# EAGLE board test (EAGLE 9.4.2)
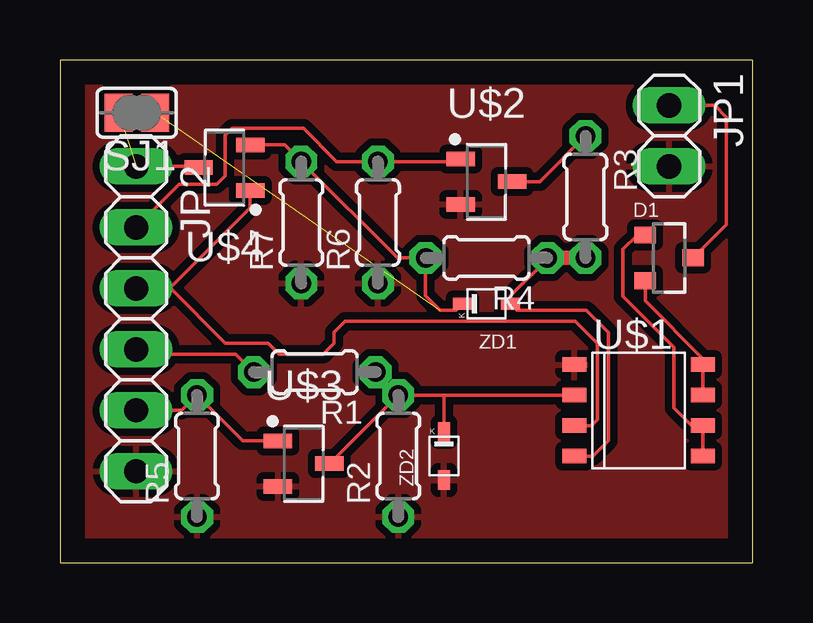
[diagram p0: board, top side]

Size 28.88 x 20.95 mm. Coordinates in mm from the lower left corner, seen from the top.
Outline: 0,0 28.88,0 28.88,20.95 0,20.95 0,0
Copper layers (1*16): Top 0.035mm / dielectric 1.5mm / Bottom 0.035mm
Design rules "default *": minimum track width 6mil, minimum drill 0.35mm, track to track 12mil, track to pad 12mil, pad to pad 12mil, via to via 12mil, smd to smd 12mil, copper to edge 40mil, drill to drill 6mil, minimum pad ring 10mil, minimum via ring 8mil, stop-mask expansion 4mil, vias tented up to drill 0mil, thermal gap 12mil

## Footprints (pad centres in the part's own frame; a part is rotated, then mirrored left to right if it is on the bottom)
SOT23 = smd 0.7 x 0.9: 1 -0.95,-1; 2 0.95,-1; 3 0,1
1X02 = drill 1.016 long: 1 -1.27,0; 2 1.27,0
1X06 = drill 1.016 long: 1 -6.35,0; 2 -3.81,0; 3 -1.27,0; 4 1.27,0; 5 3.81,0; 6 6.35,0
0204/5 = drill 0.813 octagon: 1 -2.54,0; 2 2.54,0
SJ = smd 1.168 x 1.6: 1 -0.762,0; 2 0.762,0
SOIC-08LG = smd 0.6 x 1: 1 -1.905,-2.675; 2 -0.635,-2.675; 3 0.635,-2.675; 4 1.905,-2.675; 5 1.905,2.675; 6 0.635,2.675; 7 -0.635,2.675; 8 -1.905,2.675
SOT95P250X120-3 = smd 1.18 x 0.609: 1 -1.075,0.95; 2 -1.075,-0.95; 3 1.075,0
SOD523 = smd 0.5 x 0.8: P$1 0,1; P$2 0,-1

## Placement (x,y rotation side)
D1  GSD2004S  [SOT23]  25.4,12.7 270 top
JP1  [1X02]  25.4,17.78 270 top
JP2  [1X06]  3.17,10.16 270 top
R1  103  [0204/5]  10.62,7.94 180 top
R2  103  [0204/5]  14.11,4.45 90 top
R3  104  [0204/5]  21.91,15.24 270 top
R4  103  [0204/5]  17.78,12.7 180 top
R5  103  [0204/5]  5.71,4.45 90 top
R6  103  [0204/5]  13.26,14.17 90 top
R7  105  [0204/5]  10.06,14.17 90 top
SJ1  [SJ]  3.2,18.75 180 top
U$1  TC1550TG  [SOIC-08LG]  24.13,6.35 270 top
U$2  2SK3072-TB-E  [SOT95P250X120-3]  17.78,15.88 0 top
U$3  IRLML6344TRPBFTR  [SOT95P250X120-3]  10.16,4.13 0 top
U$4  2SK3072-TB-E  [SOT95P250X120-3]  6.86,16.46 180 top
ZD1  MM5Z15V  [SOD523]  17.78,10.79 90 top
ZD2  MM5Z15V  [SOD523]  16.01,4.45 0 top

## Library data of the parts
D1 = Diode_Vishay
JP1 JP2 = pinhead
R1-R7 = rcl; SPICEPREFIX: R
SJ1 = jumper
U$1 = TC1550
U$2-U$4 = Transistor-FET
ZD1 ZD2 = fairchild-semic

## Nets
+12V: JP2.4 R1.2
GND: JP1.2 JP2.6 R2.1 R5.1 R6.1 R7.1 U$1.1 U$2.2 U$3.2 ZD2.P$2
N$1: R1.1 R2.2 U$1.2 U$3.3 ZD2.P$1
N$2: R3.1 U$2.3
N$3: R3.2 R4.1 U$1.4 ZD1.P$2
N$4: JP2.5 R5.2 U$3.1
N$5: JP2.2 R6.2 U$2.1
N$6: R4.2 R7.2 SJ1.1 U$4.2 ZD1.P$1
N$7: D1.1 U$1.5 U$1.6
N$8: D1.2 U$1.7 U$1.8
N$9: D1.3 JP1.1
VDD: JP2.1 SJ1.2 U$4.3
VPP: JP2.3 U$1.3 U$4.1

## Tracks (layer width: path | path; a pad name or v marks a point on that pad's centre or on a via)
+12V
  Top 0.152: JP2.4 4.1,8.89 4.3,8.69 7.33,8.69 R1.2
GND
  pour Top: 0,20.95 29.21,20.95 29.21,0 0,0
N$1
  Top 0.152: R2.2 R1.1 | R2.2 14.09,6.99 U$3.3 | R2.2 16.02,6.99 | 16.02,6.99 ZD2.P$1 | 16.02,6.99 U$1.2
N$2
  Top 0.152: R3.1 20,15.88 U$2.3
N$3
  Top 0.152: U$1.4 22.23,4.45 22.86,5.08 22.86,9.6 21.95,10.52 19.06,10.52 ZD1.P$2 18.78,11.11 20.32,12.65 R4.1
  Top 0.61: R4.1 R3.2
N$4
  Top 0.152: U$3.1 7.62,5.08 R5.2 5.08,6.35 JP2.5
N$5
  Top 0.152: U$2.1 16.59,16.71 R6.2 11.53,16.71 10.15,18.09 7.18,18.09 6.89,17.8 6.89,16.13 6.53,15.77 4.98,15.77 JP2.2 3.17,14.13
N$6  (1 unrouted)
  Top 0.152: ZD1.P$1 16.5,10.52 15.84,10.52 15.24,11.11 R4.2 14.07,12.7 R7.2 9.36,17.41 U$4.2
N$7
  Top 0.152: D1.1 24.07,13.65 23.47,13.05 23.47,11.1 25.6,8.97 25.6,6.45 26.34,5.71 U$1.6 U$1.5
N$8
  Top 0.152: D1.2 24.4,10.91 26.8,8.5 U$1.8 U$1.7
N$9
  Top 0.152: D1.3 27.79,14.09 27.79,18.57 27.3,19.05 JP1.1
VDD  (1 unrouted)
  Top 0.152: JP2.1 5.73,16.51 U$4.3
VPP
  Top 0.152: JP2.3 4.57,11.43 | 4.57,11.43 4.61,11.43 6.89,9.14 8.69,9.14 9.14,8.69 10.97,8.69 11.43,9.14 11.43,9.6 11.89,10.06 21.49,10.06 22.4,9.14 22.4,5.96 22.16,5.71 U$1.3 | U$4.1 7.93,14.79 4.57,11.43